# Altium PCB sensornode_v2.PcbDoc (part 1 of 2)
Units mm, origin at the board's own origin, x right, y up, seen from the top; angles counter-clockwise.
Board outline 61 x 65.5 mm, 2 copper layers (Top Layer, Bottom Layer), stack 1.6 mm thick; 116 components, 100 nets, 458 pads, 193 vias.
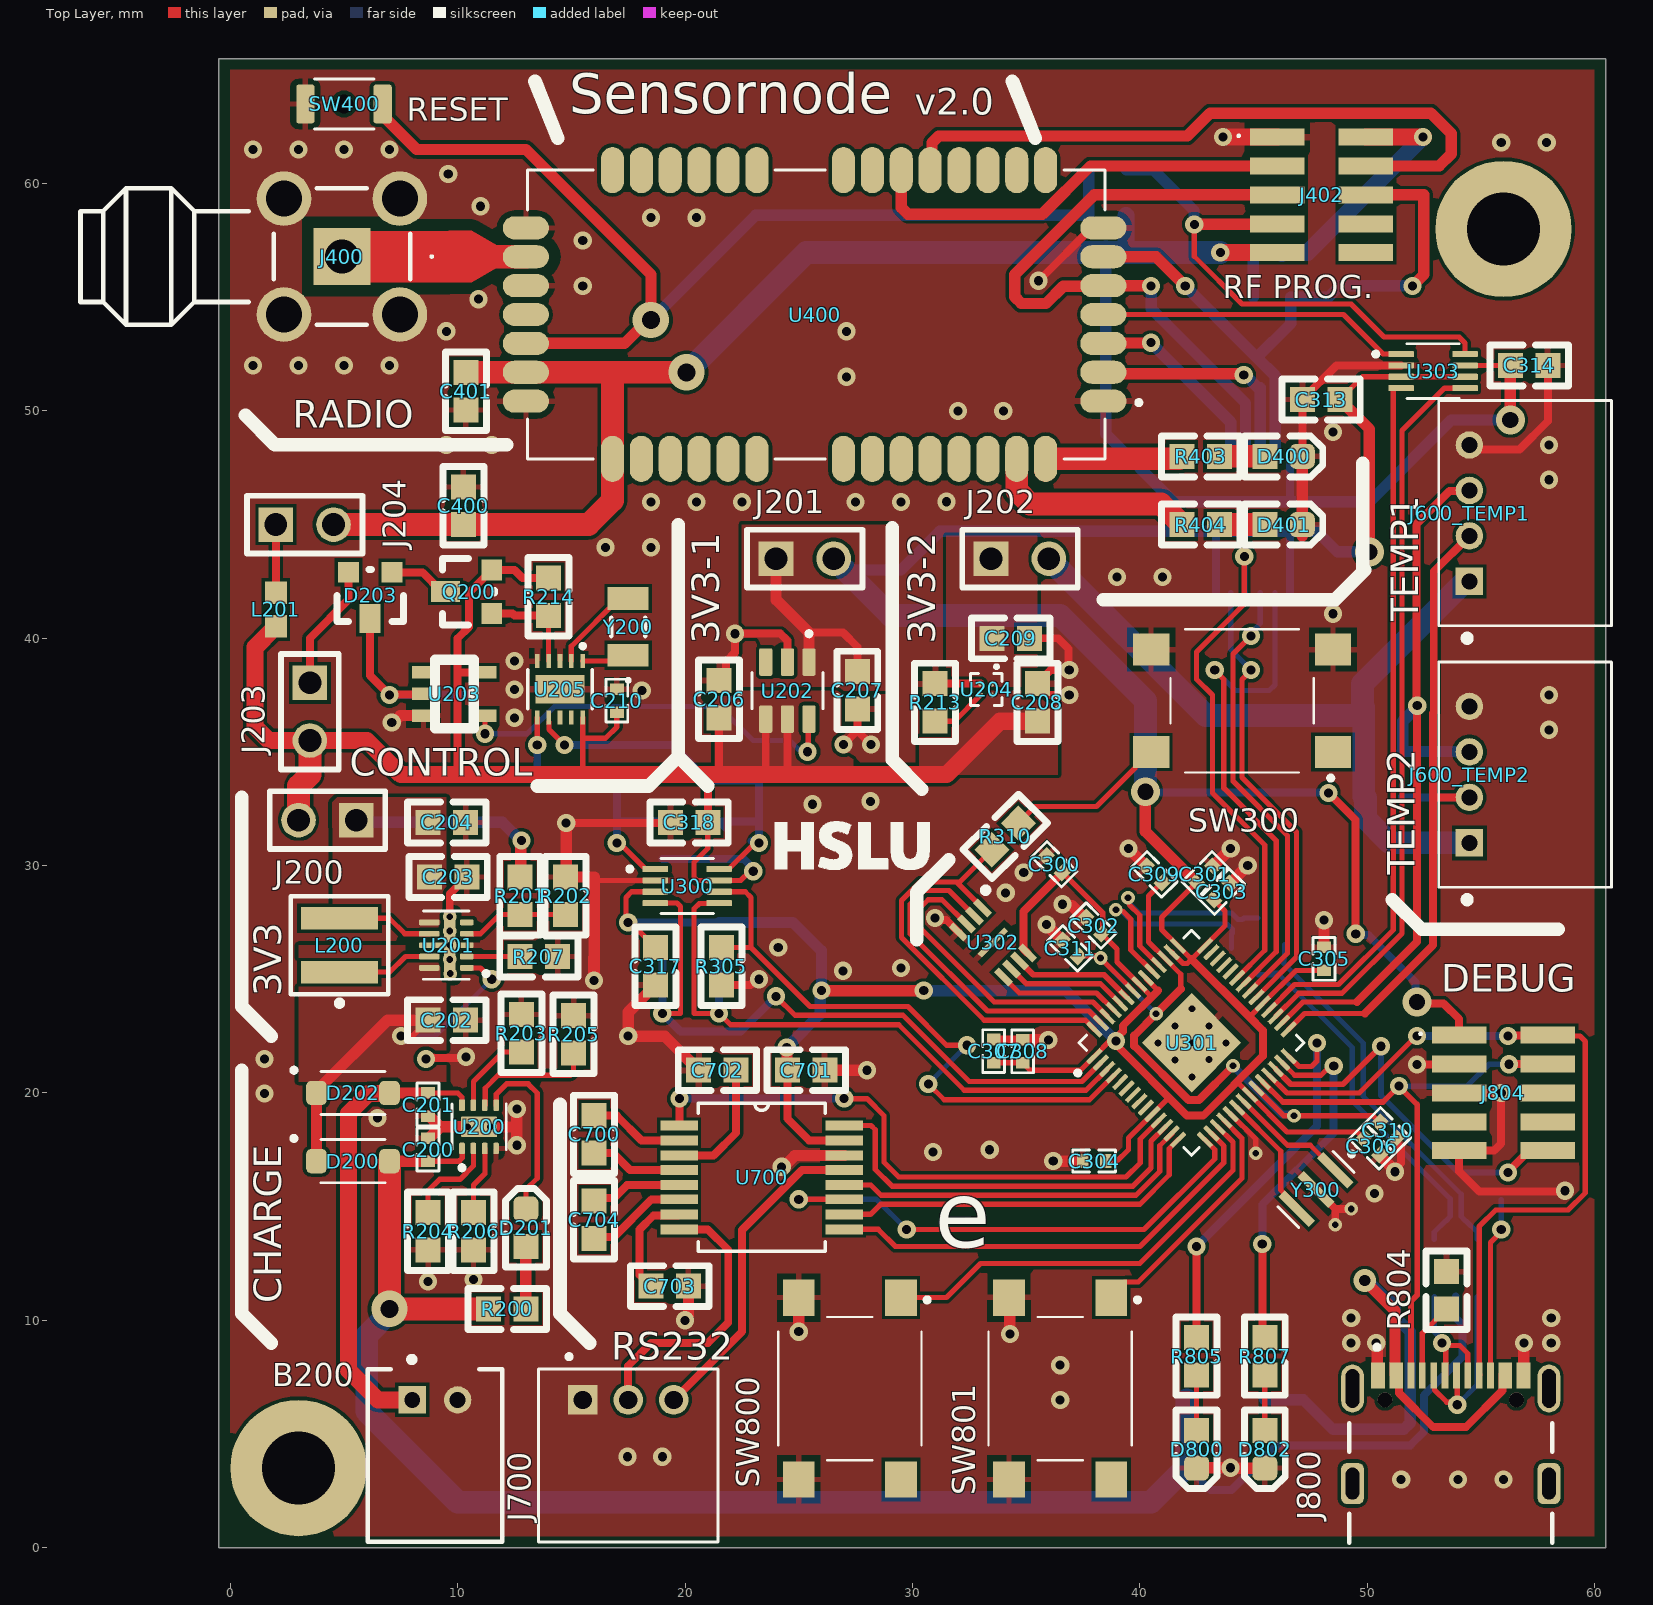
[diagram p0: Top Layer view]
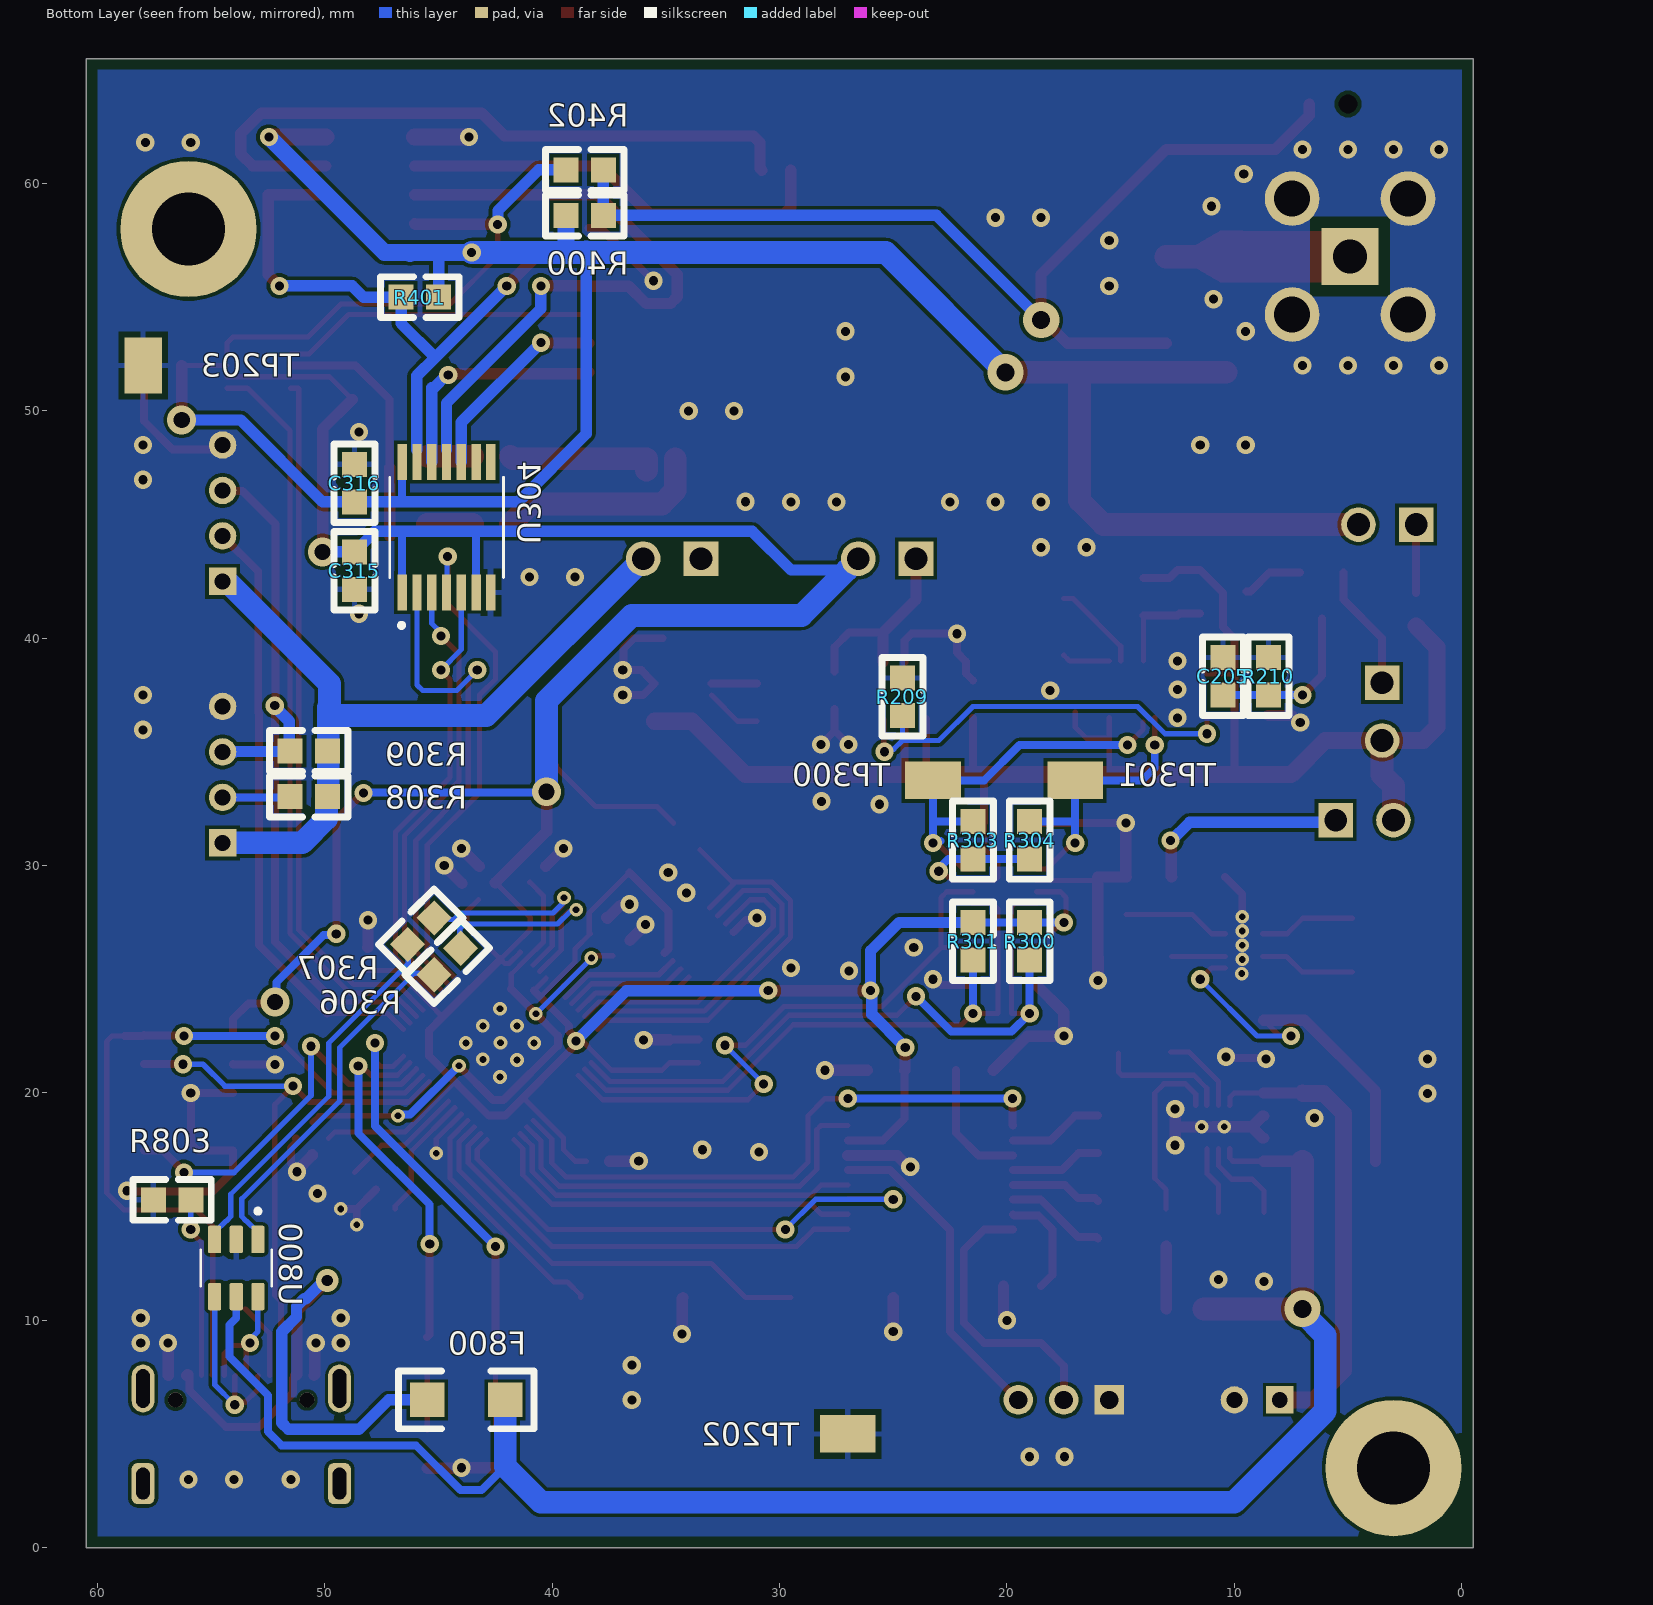
[diagram p1: Bottom Layer view, seen from below]

## Layer stack, top to bottom
Top Solder: solder mask 0.0102, Solder Resist, Dk 3.5
Top Layer: signal copper 0.035
Dielectric 1: prepreg 0.122, PP-006, Dk 4.1
Core: dielectric 1.286, FR-4, Dk 4.8
Dielectric 2: prepreg 0.122, PP-006, Dk 4.1
Bottom Layer: signal copper 0.035
Bottom Solder: solder mask 0.0102, Solder Resist, Dk 3.5

## Board outline
-0.5,0 60.5,0 60.5,65.5 -0.5,65.5

## Design rules (kind name [scope] priority, off if disabled: settings)
Clearance "Stitching GND" [IsStitchingVia and InNet('GND') vs (IsVia and (Not IsStitchingVia)) Or IsPad] p1: gap=0.127 ignorepadtopadclearanceinfootprint=FALSE
Clearance Clearance_RF_TX [InNetClass('TXM')] p2: gap=0.152 ignorepadtopadclearanceinfootprint=TRUE except(0.5: Arc-Fill Arc-Poly Arc-Region Track-Fill Track-Poly Track-Region SMDPad-Fill SMDPad-Poly SMDPad-Region THPad-Fill THPad-Poly THPad-Region Fill-Fill Fill-Poly Fill-Region Poly-Poly Poly-Region Region-Region)
Clearance Clearance_pcbway [All] p3: gap=0.152 ignorepadtopadclearanceinfootprint=FALSE
DiffPairsRouting [All] p1: maxlimit=0.254 minlimit=0.127 mostfreqgap=0.254 toplayer_minwidth=0.23 toplayer_maxwidth=0.381 toplayer_prefwidth=0.23 bottomlayer_minwidth=0.23 bottomlayer_maxwidth=0.381 bottomlayer_prefwidth=0.23 maxuncoupledlength=12.7
HoleSize HoleSize_pcbway [All] p1: absolutevalues=TRUE maxlimit=3.5 minlimit=0.3 maxpercent=80.000 minpercent=20.000
PlaneConnect PlaneConnect_1 [All] p1: planeconnectstyle=Relief reliefexpansion=0.508 reliefentries=4 reliefconductorwidth=0.254 reliefairgap=0.254
PolygonConnect PolygonConnect_RF [All vs InNetClass('3V3_RF')] p1: thpad.connectstyle=Direct thpad.reliefconductorwidth=0.5 thpad.reliefentries=4 thpad.polygonreliefangle="90 Angle" thpad.airgapwidth=0.254 smdpad.connectstyle=Relief smdpad.reliefconductorwidth=0.254 smdpad.reliefentries=4 smdpad.polygonreliefangle="90 Angle" smdpad.airgapwidth=0.254 via.connectstyle=Direct via.reliefconductorwidth=0.254 via.reliefentries=4 via.polygonreliefangle="90 Angle" via.airgapwidth=0.254
PolygonConnect PolygonConnect_VUSB [InNet('V_USB')] p2: connectstyle=Direct reliefconductorwidth=0.5 reliefentries=4 polygonreliefangle="90 Angle" airgapwidth=0.254
PolygonConnect PolygonConnect_1 [All] p3: connectstyle=Direct reliefconductorwidth=0.254 reliefentries=4 polygonreliefangle="90 Angle" airgapwidth=0.254
RoomDefinition MCU_MCU [InComponentClass('MCU_MCU')] p1: confinementstyle=ConfineIn formatcopy=TRUE lockcomponents=FALSE outline 26,12.459 52.802,12.459 52.802,41.5 26,41.5
RoomDefinition RS232 [InComponentClass('RS232')] p2: confinementstyle=ConfineIn formatcopy=TRUE lockcomponents=FALSE outline 12.5,22.5 12.5,-0.6 29.25,-0.6 29.25,22.5
RoomDefinition TEMP2 [InComponentClass('TEMP2')] p3: confinementstyle=ConfineIn formatcopy=TRUE lockcomponents=FALSE outline 52,27.2 61.75,27.2 61.75,40.6 52,40.6
RoomDefinition TEMP1 [InComponentClass('TEMP1')] p4: confinementstyle=ConfineIn formatcopy=TRUE lockcomponents=FALSE outline 52,39.2 61.75,39.2 61.75,52.127 52,52.127
RoomDefinition IO_LEDS [InComponentClass('IO_LEDS')] p5: confinementstyle=ConfineIn formatcopy=TRUE lockcomponents=FALSE outline 40.5,0.058 47.5,0.058 47.5,11.558 40.5,11.558
RoomDefinition IO_BUTTONS [InComponentClass('IO_BUTTONS')] p6: confinementstyle=ConfineIn formatcopy=TRUE lockcomponents=FALSE outline 21.5,0.5 41.5,0.5 41.5,14.5 21.5,14.5
RoomDefinition IO_USB [InComponentClass('IO_USB')] p7: confinementstyle=ConfineIn formatcopy=TRUE lockcomponents=FALSE outline 40.5,-1 63,-1 63,16.5 40.5,16.5
RoomDefinition MCU_I2C0 [InComponentClass('MCU_I2C0')] p8: confinementstyle=ConfineIn formatcopy=TRUE lockcomponents=FALSE outline 14.5,35.25 14.5,23 26.5,23 26.5,35.25
RoomDefinition MCU_RADIO [InComponentClass('MCU_RADIO')] p9: confinementstyle=ConfineIn formatcopy=TRUE lockcomponents=FALSE outline 40,40 59.5,40 59.5,54.5 40,54.5
RoomDefinition RTC [InComponentClass('RTC')] p10: confinementstyle=ConfineIn formatcopy=TRUE lockcomponents=FALSE outline 20,34.5 20,44.5 8,44.5 8,34.5
RoomDefinition POWER_3V3-RF [InComponentClass('POWER_3V3-RF')] p11: confinementstyle=ConfineIn formatcopy=TRUE lockcomponents=FALSE outline 6,47 0.5,47 0.5,39.5 6,39.5
RoomDefinition POWER_Charge [InComponentClass('POWER_Charge')] p12: confinementstyle=ConfineIn formatcopy=TRUE lockcomponents=FALSE outline 0,9 17.217,9 17.217,24.55 0,24.55
RoomDefinition POWER_3V3-2 [InComponentClass('POWER_3V3-2')] p13: confinementstyle=ConfineIn formatcopy=TRUE lockcomponents=FALSE outline 37.9,46 29,46 29,35 37.9,35
RoomDefinition POWER_CONTROL [InComponentClass('POWER_CONTROL')] p14: confinementstyle=ConfineIn formatcopy=TRUE lockcomponents=FALSE outline 14,44.5 0,44.5 0,34 14,34
RoomDefinition POWER_3V3-1 [InComponentClass('POWER_3V3-1')] p15: confinementstyle=ConfineIn formatcopy=TRUE lockcomponents=FALSE outline 29,46 19.5,46 19.5,35 29,35
RoomDefinition POWER_3V3 [InComponentClass('POWER_3V3')] p16: confinementstyle=ConfineIn formatcopy=TRUE lockcomponents=FALSE outline 0,20.4 16.8,20.4 16.8,34 0,34
RoomDefinition RADIO [InComponentClass('RADIO')] p17: confinementstyle=ConfineIn formatcopy=TRUE lockcomponents=FALSE outline 60.1,65 -9.19,65 -9.19,40.25 60.1,40.25
RoutingVias [All] p1: holewidth=0.4 width=0.8 viastyle="Through Hole" minholewidth=0.3 minwidth=0.6 maxholewidth=0.8 maxwidth=1.27
SolderMaskExpansion [All] p1: expansion=0.102 istentingtop=FALSE
Width Width_pcbway [All] p1: maxlimit=3 minlimit=0.23 preferedwidth=0.35 minimp=50.000000 maximp=50.000000 favimp=50.000000
27 further rules are at their usual default settings.

## Classes and differential pairs
net class 3V3_RF: 3V3_RF \RF_RESET CONFIG GND NetD400_A NetD401_A NetR400_1 NetR403_1 NetR404_1 NetU400_11 RF_Antenna RF_DC RF_DD RF_RXD RF_TXD UART1.CTS UART1.RTS
component class IO_LEDS: D800 D802 R805 R807
component class IO_BUTTONS: SW800 SW801
component class IO_USB: F800 J800 R803 R804 U800
component class MCU_MCU: C300 C301 C302 C303 C304 C305 C306 C307 C308 C309 C310 C311 R306 R307 R310 SW300 U301 U302 Y300
component class MCU_RADIO: C313 C314 C315 C316 U303 U304
component class MCU_I2C0: C317 C318 R300 R301 R303 R304 R305 TP300 TP301 U300
component class POWER_CONTROL: C205 D203 J203 R210 U203
component class POWER_3V3-RF: J204 L201
component class POWER_Charge: C200 C201 D201 R200 R203 R204 R205 R206 U200
component class POWER_3V3-1: C206 C207 J201 R209 U202
component class RTC: C210 Q200 R214 U205 Y200
component class POWER_3V3: C202 C203 C204 J200 L200 R201 R202 R207 U201
component class POWER_3V3-2: C208 C209 J202 R213 U204
net class TXM: RF_Antenna
net class 3V3: 3V3 3V3-1 3V3-1_ON 3V3-1_OUT 3V3-2 3V3-2_OUT 3V3_RF 3V3_VOUT \RF_RESET CONFIG GND HEADER_WAKEUP I2C0.SCL I2C0.SDA NetC205_2 NetD201_A NetD201_K NetD400_A NetD401_A NetJ204_1 NetJ402_8 NetJ402_10 NetL200_1 NetL200_2 NetQ200_G NetR201_2 NetR203_1 NetR204_1 NetR205_1 NetR206_1 NetR400_1 NetR403_1 NetR404_1 NetU201_5 NetU205_1 NetU205_2 NetU205_9 NetU400_11 POWER_3V3-1_EN POWER_3V3-2_EN POWER_3V3_PS RF_Antenna RF_DC RF_DD RF_RXD RF_TXD RTC_WakeUp UART1.CTS UART1.RTS V_BAT V_SUPPLY V_USB
net class 3V3-2: 3V3-2 GND I2C1_SCL I2C1_SDA
net class 3V3-1: 1V1 3V3 3V3-1 3V3-2 3V3_RF \ENABLE \FORCEOFF \INVALID \RF_RESET BUTTON_1 BUTTON_2 CONFIG FORCEON GND I2C0.SCL I2C0.SDA I2C0_ENABLE I2C0_SCL I2C0_SDA I2C1_SCL I2C1_SDA LED_1 LED_2 NetC700_1 NetC700_2 NetC702_2 NetC703_2 NetC704_1 NetC704_2 NetD800_A NetD802_A NetJ700_2 NetJ700_3 NetJ804_6 NetJ804_7 NetJ804_8 NetR310_1 NetU301_4 NetU301_5 NetU301_15 NetU301_20 NetU301_21 NetU301_34 NetU301_41 NetU304_3 POWER_3V3-1_EN POWER_3V3-2_EN POWER_3V3_PS QSPI_CS_N QSPI_SCLK QSPI_SD0 QSPI_SD1 QSPI_SD2 QSPI_SD3 RESET RF_CONFIG RF_R\E\S\E\T\ RF_RXD RF_TXD SWD_CLK SWDIO UART0_RXD UART0_TXD UART1.CTS UART1.RTS UART1_CTS UART1_RTS UART1_RXD UART1_TXD USB_D_N USB_D_P USB_N USB_P
component class TEMP2: J600_TEMP2
component class TEMP1: J600_TEMP1
component class sensornode_v2: MTH100 MTH101 MTH102 MTH103
component class RS232: C700 C701 C702 C703 C704 J700 U700
component class MCU: C300 C301 C302 C303 C304 C305 C306 C307 C308 C309 C310 C311 C313 C314 C315 C316 C317 C318 R300 R301 R303 R304 R305 R306 R307 R308 R309 R310 SW300 TP300 TP301 U300 U301 U302 U303 U304 Y300
component class IOs: D800 D802 F800 J800 J804 R803 R804 R805 R807 SW800 SW801 U800
component class RADIO: C400 C401 D400 D401 J400 J402 R400 R401 R402 R403 R404 SW400 U400
component class POWER: B200 C200 C201 C202 C203 C204 C205 C206 C207 C208 C209 C210 D200 D201 D202 D203 J200 J201 J202 J203 J204 L200 L201 Q200 R200 R201 R202 R203 R204 R205 R206 R207 R209 R210 R213 R214 TP202 TP203 U200 U201 U202 U203 U204 U205 Y200
channel class temperature: TEMP1 TEMP2 TEMP3 TEMP4
differential pair USB: +USB_P -USB_N
differential pair USB_D: +USB_D_P -USB_D_N

## Components (designator, comment, footprint, x,y, rotation, side; value= is the part's Value field where it differs from the comment)
B200 "Battery" "JST-S2B-PH-K-S_V - CLONED" 9,4.05 r0 top
C200 "1µF" 0402 8.7,18.016 r270 top
C201 "1µF" 0402 8.7,18.984 r90 top
C202 "Capacitor 0402" 0603 10.35,23.2 r180 top value=10uF
C203 "Capacitor 0603" 0603 10.4,29.5 r180 top value=22uF
C204 "Capacitor 0603" 0603 10.35,31.9 r180 top value=22uF
C205 "100n" 0603 10.5,39.15 r270 bottom
C206 "1µF" 0603 21.5,38.15 r270 top
C207 "100nF" 0603 27.576,36.879 r90 top
C208 "1µF" 0603 35.5,38 r270 top
C209 "100nF" 0603 35.15,40 r180 top
C210 "Capacitor 0402" 0402 17,37.766 r270 top value=100nF
C300 "Capacitor 0402" 0402 36.6,29.7 r135 top value=100nF
C301 "1µF" 0402 42.5,29.25 r45 top
C302 "Capacitor 0402" 0402 38.333,27 r135 top value=100nF
C303 "Capacitor 0402" 0402 43.25,28.5 r45 top value=100nF
C304 "Capacitor 0402" 0402 38.5,17 r180 top value=100nF
C305 "Capacitor 0402" 0402 48.111,25.389 r90 top value=100nF
C306 "Capacitor 0402" 0402 49.845,18.008 r315 top value=100nF
C307 "Capacitor 0402" 0402 33.576,21.334 r90 top value=100nF
C308 "Capacitor 0402" 0402 34.853,21.32 r90 top value=100nF
C309 "1µF" 0402 41,29.257 r135 top
C310 "Capacitor 0402" 0402 50.552,18.715 r315 top value=100nF
C311 "Capacitor 0402" 0402 37.3,26 r135 top value=100nF
C313 "" 0603 47.15,50.5 r0 top value=100nF
C314 "" 0603 56.3,52 r0 top value=100nF
C315 "" 0603 48.7,42.15 r90 bottom value=100nF
C316 "" 0603 48.7,46 r90 bottom value=100nF
C317 "" 0603 18.7,26.4 r270 top value=100nF
C318 "" 0603 19.35,31.9 r0 top value=100nF
C400 "" 0603 10.25,46.65 r270 top value=100nF
C401 "" 0603 10.36,50.04 r90 top value=100nF
C700 "Capacitor 0603" 0603 16,17.35 r90 top value=100nF
C701 "Capacitor 0603" 0603 26.15,21 r180 top value=100nF
C702 "Capacitor 0603" 0603 20.6,21 r0 top value=100nF
C703 "Capacitor 0603" 0603 20.15,11.5 r180 top value=100nF
C704 "Capacitor 0603" 0603 16,13.6 r90 top value=100nF
D200 "PMEG2010ER" SODFL3517X110N 5.395,17 r0 top
D201 "Orange" 0603-DIODE 13,13.25 r90 top
D202 "PMEG2010ER" SODFL3517X110N 5.395,20 r0 top
D203 "BAS40-05" SOT-23 7.105,42.9 r180 top
D400 "Red" 0603-DIODE 45.5,48 r0 top
D401 "Orange" 0603-DIODE 45.5,45 r0 top
D800 "Green" 0603-DIODE 42.5,5.15 r270 top
D802 "Red" 0603-DIODE 45.5,5.15 r270 top
F800 "500mA" 1206 45.5,6.5 r180 bottom
J200 "HEADER_2x1_TD" HEADER_2_RM_2.54 5.54,32 r270 top
J201 "HEADER_2x1_TD" HEADER_2_RM_2.54 24,43.5 r90 top
J202 "HEADER_2x1_TD" HEADER_2_RM_2.54 33.46,43.5 r90 top
J203 "HEADER_2x1_TD" HEADER_2_RM_2.54 3.5,38.04 r0 top
J204 "HEADER_2x1_TD" HEADER_2_RM_2.54 2,45 r90 top
J400 "HEADER_2x1_TD" SMARACONNECTOR 4.91,56.79 r0 top
J402 "HEADER_5x2_LR" HEADER_SMD_1.27 48,59.5 r270 top (schematic designator J401)
J600_TEMP1 "I2C - TMP117" JST_S4B-PH-K-S(LF)(SN) 54.5,45.5 r90 top (schematic designator J600)
J600_TEMP2 "I2C - TMP117" JST_S4B-PH-K-S(LF)(SN) 54.5,34 r90 top (schematic designator J600)
J700 "CON3" JST_S3B-PH-K-S(LF)(SN) 15.5,6.5 r0 top
J800 "USB-C" USB_GCT_4105-GF-A 53.68,2.82 r0 top value=USB4105-GF-A
J804 "HEADER_5x2_LR" HEADER_SMD_1.27 56,20 r270 top
L200 "0.47uH" FP-XFL4015-MFG 4.8,26.5 r90 top
L201 "BLM18SG331TN1" 1608X65N_BEADC 2,41.265 r90 top
Q200 "DMP3099LQ" "SOT-23 - FET" 11.5,41.095 r90 top
R200 "270" 0603 13,10.5 r180 top
R201 "511k" 0603 12.75,29.5 r270 top
R202 "91k" 0603 14.75,27.85 r90 top
R203 "24k" 0603 12.8,21.8 r90 top
R204 "1k5" 0603 8.7,14.75 r270 top
R205 "8.2k" 0603 15.1,21.75 r90 top
R206 "10k" 0603 10.7,14.75 r270 top
R207 "100k" 0603 14.4,26 r180 top
R209 "100k" 0603 24.6,36.6 r90 bottom
R210 "10k" 0603 8.5,39.15 r270 bottom
R213 "100k" 0603 31,36.35 r90 top
R214 "330k" 0603 14,41 r90 top
R300 "DNP" 0603 19,27.5 r270 bottom
R301 "DNP" 0603 21.5,27.5 r270 bottom
R303 "DNP" 0603 21.5,30.3 r90 bottom
R304 "DNP" 0603 19,30.3 r90 bottom
R305 "100k" 0603 21.6,26.4 r270 top
R306 "27" 0603 44.033,26.367 r315 bottom
R307 "27" 0603 45.2,27.7 r315 bottom
R308 "4k7" 0603 49.884,33.034 r0 bottom
R309 "4k7" 0603 49.884,35.034 r0 bottom
R310 "1k" 0603 34.667,31.867 r225 top
R400 "5k6" 0603 37.75,58.6 r0 bottom
R401 "8k2 (DNP)" 0603 46.65,55 r180 bottom
R402 "0" 0603 39.4,60.6 r180 bottom
R403 "150 DNP" 0603 41.85,48 r0 top
R404 "150 DNP" 0603 41.85,45 r0 top
R803 "5k1" 0603 57.55,15.3 r180 bottom
R804 "5k1" 0603 53.5,12.15 r270 top
R805 "120" 0603 42.5,7.604 r90 top
R807 "120" 0603 45.5,7.604 r90 top
SW300 "BOOTSEL" SWITCH_B3FS1010P 44.5,37.25 r0 top
SW400 "B3U-1000P-B" OMRON-B3U-1000P-2-B_V 5,63.5 r0 top
SW800 "SW_TACTILE_1" SWITCH_B3FS1010P 27.25,7 r90 top
SW801 "SW_TACTILE_1" SWITCH_B3FS1010P 36.5,7 r90 top
TP202 "TP_SMD" TP+245X165 27,5 r180 bottom
TP203 "TP_SMD" TP+245X165 58,52 r90 bottom
TP300 "TP_SMD" TP+245X165 23.25,33.75 r180 bottom
TP301 "TP_SMD" TP+245X165 17,33.75 r180 bottom
U200 "IC_BQ25172DSGR" IC_BQ25172DSGR 10.94,18.51 r90 top
U201 "TPS63802DLAR" VREG_TPS63802DLAR 9.5,26.5 r180 top
U202 "TPS22860DBVR" SOT95P280X145-6N 24.5,37.7 r270 top
U203 "SN74AUP1G32" SOT23-5 8.5,38.5 r270 top
U204 "TPS22908" BGA4C50P2X2_88X88X62N 33.25,37.75 r270 top
U205 "PCF85063ATL/1,118" 10-DFN(2.6X2.6) 14.5,37.755 r270 top
U300 "TCA9406" VSSOP_SOP50P310X90-8N 20.095,29.1 r0 top
U301 "RP2040_2" QFN40P700X700X90-57N 42.277,22.207 r45 top
U302 "W25Q16JVUXIQ" SON50P300X200X60-9N 33.54,26.62 r315 top
U303 "TXU0102PWR" VFSOP-8 52.905,51.75 r0 top
U304 "TXU0104PWR" TSSOP-14 44.65,44.88 r90 bottom
U400 "RC1701HP-RC232" RF_RC1701HP 25.065,54.24 r180 top
U700 "MAX3221 SSOP" SSOP_SOP65P780X200-16N 23.368,16.286 r0 top
U800 "ESD_USBLC6-2SC6_1" SOT95P280X145-6N 53.9,12.3 r270 bottom
Y200 "SC32S-7PF20PPM" SC32S7PF20PPM 17.5,40.5 r90 top
Y300 "CSTNE12M0GH5L000R0" OSC_CSTNE12M0GH5L000R0 47.751,15.753 r225 top

## Footprints (in the part's own frame and the unit in brackets; to place one, negate y for a bottom-side part, rotate by r counter-clockwise, add the part's x,y. Pads: shape width x height; smd on the part's side, far side on the other; paste and mask are expansions set on the pad)
10-DFN(2.6X2.6) [mil]
  rect 24x8 smd: 1(-49,39.37) 2(-49,19.68) 3(-49,0) 4(-49,-19.68) 5(-49,-39.37) 6(49,-39.37) 7(49,-19.68) 8(49,0) 9(49,19.68) 10(49,39.37)
  rect 49x85 smd paste-78.74: 11(0,0)
  silkscreen extent -77,-56 34,56, body extent -51,-51 51,51, height 20
0402 [mil]
  rect 20x24 smd: 1(0,0) 2(40,0)
  silkscreen extent -17,-19 57,19, body extent -8,-10 48,10, height 18
0603 [mm]
  rect 1.1x1.1 smd: 1(0,0) 2(1.65,0)
  silkscreen extent -0.9,-0.9 2.55,0.9, body extent -0.45,-0.43 2.1,0.43, height 0.45
0603-DIODE [mm]
  rect 1.1x1.1 smd: A(0,0)
  rrect50% 1.1x1.1 smd: K(1.65,0)
  silkscreen extent -0.9,-0.9 2.55,0.9, body extent -0.45,-0.43 2.1,0.43, height 0.45
1206 [mil]
  rect 60x60 smd: 1(0,0) 2(135,0)
  silkscreen extent -50,-50 185,50, body extent 4,-31 130,31, height 51
1608X65N_BEADC [mm]
  rect 1x0.97 smd: 1(-0.735,0) 2(0.735,0)
BGA4C50P2X2_88X88X62N [mm]
  round 0.23 smd: A1(-0.25,0.25) A2(0.25,0.25) B1(-0.25,-0.25) B2(0.25,-0.25)
  silkscreen extent -1.07,-0.7 0.7,0.7, body extent -0.44,-0.44 0.44,0.44, height 0.63
FP-XFL4015-MFG [mm]
  rect 0.98x3.4 smd paste+0 mask+0: 1(-1.185,0) 2(1.185,0)
  silkscreen extent -2.67,-2.15 2.15,2.15, body extent -2.25,-2.25 2.25,2.25, height 0.25
HEADER_2_RM_2.54 [mil] "Header 2 Pin 2.54mm"
  rect 60x60 hole 39.37: 1(0,0)
  round 60 hole 39.37: 2(0,-100)
  silkscreen extent -50,-150 50,50, body extent -50,-150 50,50, height 394
HEADER_SMD_1.27 [mm]
  rect 0.75x2.4 smd: 1(-2.54,-1.95) 2(-2.54,1.95) 3(-1.27,-1.95) 4(-1.27,1.95) 5(0,-1.95) 6(0,1.95) 7(1.27,-1.95) 8(1.27,1.95) 9(2.54,-1.95) 10(2.54,1.95)
  silkscreen extent -2.65,-3.7 -2.55,-3.6, body extent -3.08,-2.4 3.27,2.6, height 4.55
IC_BQ25172DSGR [mm]
  rrect40% 0.5x0.25 smd mask+0.05: 1(-0.95,0.75) 2(-0.95,0.25) 3(-0.95,-0.25) 4(-0.95,-0.75) 5(0.95,-0.75) 6(0.95,-0.25) 7(0.95,0.25) 8(0.95,0.75)
  rrect12% 0.9x1.6 smd paste-2 mask+0.05: 9(0,0)
  silkscreen extent -1.9,-1.19 1,1.19, body extent -1,-1 1,1, height 0.8
"JST-S2B-PH-K-S_V - CLONED" [mm] "THD, 2-Leads, Body 7.6x5.9mm, Pitch 2mm"
  rect 1.2x1.2 hole 0.7: 1(-1,2.45)
  round 1.2 hole 0.7: 2(1,2.45)
  silkscreen extent -2.95,-3.8 2.95,4.35, body extent -2.95,-3.8 2.95,3.8, height 4.8
JST_S3B-PH-K-S(LF)(SN) [mm]
  rect 1.308x1.308 hole 0.8: 1(0,0)
  round 1.308 hole 0.8: 2(2,0) 3(4,0)
  silkscreen extent -1.95,-6.25 5.95,2, body extent -2,-6.3 5.9,1.3, height 4.8
JST_S4B-PH-K-S(LF)(SN) [mm]
  rect 1.208x1.208 hole 0.7: 1(-3,0)
  round 1.208 hole 0.7: 2(-1,0) 3(1,0) 4(3,0)
  silkscreen extent -5.64,-6.25 4.95,1.35, body extent -5,-6.2 4.9,1.4, height 4.8
OMRON-B3U-1000P-2-B_V [mm] "SMT, 2-Leads, Body 3x2.5mm"
  rrect25% 0.8x1.7 smd: 1(-1.7,0) 2(1.7,0)
  round 0 hole 0.85 unplated: H1(0,0)
  silkscreen extent -1.3,-1.1 1.3,1.1, body extent -2,-1.25 2,1.25, height 1.6
OSC_CSTNE12M0GH5L000R0 [mm]
  rect 0.4x1.9 smd: 1(-1.2,0) 2(0,0) 3(1.2,0)
  silkscreen extent -2.32,-0.65 1.72,0.65, body extent -1.6,-0.65 1.6,0.65, height 0.8
QFN40P700X700X90-57N [mm]
  rrect25% 0.84x0.2 smd: 1(-3.435,2.6) 2(-3.435,2.2) 3(-3.435,1.8) 4(-3.435,1.4) 5(-3.435,1) 6(-3.435,0.6) 7(-3.435,0.2) 8(-3.435,-0.2) 9(-3.435,-0.6) 10(-3.435,-1) 11(-3.435,-1.4) 12(-3.435,-1.8) 13(-3.435,-2.2) 14(-3.435,-2.6) 29(3.435,-2.6) 30(3.435,-2.2) 31(3.435,-1.8) 32(3.435,-1.4) 33(3.435,-1) 34(3.435,-0.6) 35(3.435,-0.2) 36(3.435,0.2) 37(3.435,0.6) 38(3.435,1) 39(3.435,1.4) 40(3.435,1.8) 41(3.435,2.2) 42(3.435,2.6)
  rrect25% 0.2x0.84 smd: 15(-2.6,-3.435) 16(-2.2,-3.435) 17(-1.8,-3.435) 18(-1.4,-3.435) 19(-1,-3.435) 20(-0.6,-3.435) 21(-0.2,-3.435) 22(0.2,-3.435) 23(0.6,-3.435) 24(1,-3.435) 25(1.4,-3.435) 26(1.8,-3.435) 27(2.2,-3.435) 28(2.6,-3.435) 43(2.6,3.435) 44(2.2,3.435) 45(1.8,3.435) 46(1.4,3.435) 47(1,3.435) 48(0.6,3.435) 49(0.2,3.435) 50(-0.2,3.435) 51(-0.6,3.435) 52(-1,3.435) 53(-1.4,3.435) 54(-1.8,3.435) 55(-2.2,3.435) 56(-2.6,3.435)
  rect 3.1x3.1 smd paste-0.57: 57(0,0)
  silkscreen extent -4.57,-3.5 3.5,3.5, body extent -3.5,-3.5 3.5,3.5, height 0.9
RF_RC1701HP [mil]
  oval 80x40 smd: 1(-525,150) 2(-525,100) 3(-525,50) 4(-525,0) 5(-525,-50) 6(-525,-100) 7(-525,-150) 8(475,-150) 9(475,-100) 10(475,-50) 11(475,0) 12(475,50) 13(475,100) 14(475,150)
  oval 40x80 smd: 15(-425,-250) 16(-375,-250) 17(-325,-250) 18(-275,-250) 19(-225,-250) 20(-175,-250) 21(-125,-250) 22(-75,-250) 23(-75,250) 24(-125,250) 25(-175,250) 26(-225,250) 27(-275,250) 28(-325,250) 29(-375,250) 30(-425,250) 31(75,250) 32(75,-250) 33(125,250) 34(125,-250) 35(175,250) 36(175,-250) 37(225,250) 38(225,-250) 39(275,250) 40(275,-250) 41(325,250) 42(325,-250)
  silkscreen extent -590,-250 472,250, body extent -528,-252 472,254, height 154
SC32S7PF20PPM [mm]
  rect 1x1.8 smd: 1(-1.25,0) 2(1.25,0)
  silkscreen extent -2.4,-0.75 0.4,0.75, body extent -1.65,-0.8 1.65,0.8, height 0.84
SMARACONNECTOR [mm]
  rect 2.5x2.5 hole 1.5: 1(0,0)
  round 2.4 hole 1.6: 2(-2.55,-2.55) 2(-2.55,2.55) 2(2.55,-2.55) 2(2.55,2.55)
  silkscreen extent -11.5,-3 4,3, body extent -11.4,-3.17 2.9,3.17, height 7.78
SODFL3517X110N [mm]
  rrect50% 0.91x1.07 smd: A(1.605,0) K(-1.605,0)
  silkscreen extent -2.7,-0.95 1.4,1.1
SON50P300X200X60-9N [mm]
  rect 0.9x0.3 smd: 1(-1.4,0.75) 2(-1.4,0.25) 3(-1.4,-0.25) 4(-1.4,-0.75) 5(1.4,-0.75) 6(1.4,-0.25) 7(1.4,0.25) 8(1.4,0.75)
  rect 0.25x1.65 smd: 9(0,0)
  silkscreen extent -1.97,1.28 -1.73,1.52, body extent -1.55,-1 1.55,1, height 0.6
SOT23-5 [mm]
  rect 0.55x1 smd: 1(0,0) 2(0.95,0) 3(1.9,0) 4(1.9,2.7) 5(0,2.7)
  silkscreen extent -0.55,0.5 2.45,2.2, body extent -0.55,0.5 2.45,2.2, height 1.45
SOT95P280X145-6N [mm]
  rrect25% 1.21x0.58 smd: 1(-1.255,0.95) 2(-1.255,0) 3(-1.255,-0.95) 4(1.255,-0.95) 5(1.255,0) 6(1.255,0.95)
  silkscreen extent -2.6,-1.56 0.8,1.56, body extent -1.35,-1.45 1.35,1.45, height 1.45
SOT-23 [mil]
  rect 36x36 smd: 1(0,0) 2(75,0)
  rect 36x50 smd: 3(38,80)
  silkscreen extent -20,-5 95,85, body extent -20,-5 95,85, height 69
"SOT-23 - FET" [mil]
  rect 36x50 smd: D(38,80)
  rect 36x36 smd: G(0,0) S(75,0)
  silkscreen extent -20,-5 95,85, body extent -20,-5 95,85, height 69
SSOP_SOP65P780X200-16N [mil]
  rect 65x17 smd: 1(-143,90) 2(-143,64) 3(-143,38) 4(-143,13) 5(-143,-13) 6(-143,-38) 7(-143,-64) 8(-143,-90) 9(143,-90) 10(143,-64) 11(143,-38) 12(143,-13) 13(143,13) 14(143,38) 15(143,64) 16(143,90)
  silkscreen extent -110,-128 110,128, body extent -154,-128 154,128, height 79
SWITCH_B3FS1010P [mm]
  rect 1.6x1.4 smd: 1(-4,-2.25) 1(4,-2.25) 2(-4,2.25) 2(4,2.25)
  silkscreen extent -3.15,-3.5 4,3.15, body extent -4,-3.2 4,3.1, height 4.3
TP+245X165 [mm]
  rect 2.45x1.65 smd: 1(0,0)
  body extent -1,-0.63 1,0.63, height 1.44
TSSOP-14 [mm] "TSSOP-14 / SOP65P640X120-14N"
  rect 1.57x0.41 smd: 1(-2.87,1.95) 2(-2.87,1.3) 3(-2.87,0.65) 4(-2.87,0) 5(-2.87,-0.65) 6(-2.87,-1.3) 7(-2.87,-1.95) 8(2.87,-1.95) 9(2.87,-1.3) 10(2.87,-0.65) 11(2.87,0) 12(2.87,0.65) 13(2.87,1.3) 14(2.87,1.95)
  silkscreen extent -4.41,-2.5 2.2,2.5, body extent -3.2,-2.5 3.2,2.5, height 1.2
USB_GCT_4105-GF-A [mm]
  rect 0.6x1.15 smd: A1_B12(-3.2,4.755) A4_B9(-2.4,4.755) B1_A12(3.2,4.755) B4_A9(2.4,4.755)
  rect 0.3x1.15 smd: A5(-1.25,4.755) A6(-0.25,4.755) A7(0.25,4.755) A8(1.25,4.755) B5(1.75,4.755) B6(0.75,4.755) B7(-0.75,4.755) B8(-1.75,4.755)
  oval 1x2.1 hole 0.6 slot 1.7 at 90 deg: SH1(-4.32,4.18) SH2(4.32,4.18)
  rrect50% 1x1.8 hole 0.6 slot 1.4 at 90 deg: SH3(-4.32,0) SH4(4.32,0)
  round 0.65 hole 0.65 unplated: ""(-2.89,3.68) ""(2.89,3.68)
  silkscreen extent -4.47,-2.6 4.47,6.1, body extent -4.47,-2.6 4.47,5.11, height 3.31
VFSOP-8 [mm] "SOP50P310X90-8N"
  rrect25% 1.12x0.27 smd: 1(-1.405,0.75) 2(-1.405,0.25) 3(-1.405,-0.25) 4(-1.405,-0.75) 5(1.405,-0.75) 6(1.405,-0.25) 7(1.405,0.25) 8(1.405,0.75)
  silkscreen extent -2.62,-1.2 1.15,1.2, body extent -1.5,-1 1.6,1, height 0.9
VREG_TPS63802DLAR [mm]
  rrect40% 0.6x0.25 smd mask+0: 1(-0.9,1) 2(-0.9,0.5) 3(-0.9,0) 4(-0.9,-0.5) 5(-0.9,-1)
  rrect40% 0.9x0.25 smd mask+0: 6(0.75,-1) 7(0.75,-0.5) 9(0.75,0.5) 10(0.75,1)
  rrect12% 0.5x3 smd paste-2 mask+0.05: 8(-0.15,0)
  rrect40% 1.3x0.25 smd paste-2 mask+0: 8(0.55,0)
  silkscreen extent -1.85,-1.5 1,1.5, body extent -1,-1.5 1,1.5, height 1
VSSOP_SOP50P310X90-8N [mm]
  rrect25% 1.12x0.27 smd: 1(-1.405,0.75) 2(-1.405,0.25) 3(-1.405,-0.25) 4(-1.405,-0.75) 5(1.405,-0.75) 6(1.405,-0.25) 7(1.405,0.25) 8(1.405,0.75)
  silkscreen extent -2.62,-1.2 1.15,1.2, body extent -1.55,-1 1.55,1, height 0.9

## Part data
C200 C201 C203 C204 C205 C206 C207 C208 C209 C210 C400 C401 C700 C701 C702 C703 C704: library part C, Case/Package=0402, Manufacturer=TDK, Manufacturer Part Number=C1005X6S0J105K050BC, Max Operating Temperature=85°C, Tolerance=10%, Voltage Rating=6.3V, Component Type=Capacitors, Mounting Technology=SM, Pins=2, RoHS Compliant=True
C202: library part C, Case/Package=0402, Manufacturer=TDK, Manufacturer Part Number=C1005X6S0J105K050BC, Max Operating Temperature=85°C, Tolerance=10%, Voltage=25, Voltage Rating=6.3V, Component Type=Capacitors, Mounting Technology=SM, Pins=2, RoHS Compliant=True
C300 C301 C302 C303 C304 C305 C306 C307 C308 C309 C310 C311 C313 C314 C315 C316 C317 C318: library part C, Case/Package=0402, Manufacturer="Kyocera AVX", Manufacturer Part Number=04026D105KAT2A, Max Operating Temperature=85°C, Tolerance=10%, Voltage Rating=6.3V, Component Type=Capacitors, Mounting Technology=SM, Pins=2, RoHS Compliant=True
D200 D202: library part Schotky_1, Supplier Part Number 1=7040635, Supplier 1="Future Electronics"
D201 D400 D401 D800 D802: library part LED_1
D203: library part Schotky_BAS40-5, Supplier Part Number 1=726-BAS4005E6327HTSA, Supplier 1=Mouser
F800: library part FUSE_1, "Resettable Fuse"
J400: Supplier Part Number 1=471-SMARACONNECTORWP, Supplier 1=Mouser
J402: Supplier Part Number 1=2053212, Supplier 1=Rs
J600_TEMP1 J600_TEMP2: library part CON4
J800: library part USB-C_2, "Connector 24 (16+8 Dummy)"
L200: library part L?, Supplier Part Number=81-1276AS-H-R47MP2, Supplier Part Number 1=2289211, Name=XFL4015-471MEB, Supplier=Mouser, Supplier 1=Farnell
L201: library part L?, "330 Ohms @ 100 MHz 1 Power Line Ferrite Bead 0603 (1608 Metric) 1.5A 70mOhm", Supplier Part Number 1=81-BLM18SG331TN1D, Info=Ferritperle, Supplier 1=Mouser
Q200: library part "MOSFET P"
R200 R201 R203 R204 R205 R206 R207 R209 R210 R213 R214 R300 R301 R303 R304 R305 R306 R307 R308 R309 R310 R400 R401 R402 R403 R404 R803 R804 R805 R807: library part R?, "Normaler Widerstand"
R202: library part R?, "Normaler Widerstand", Supplier Part Number=595-TPS63802DLAR, Supplier=Mouser
SW300: library part SW_TACTILE_1
SW400: library part CMP-011-00011-1, "Ultra-small Surface-mounting Tactile Switches with High Contact Reliability, SPST-NO, -25 to 70 degC, 2-Pin SMD, RoHS, Tape and Reel", Voltage Rating=12V, Pins=2, RoHS Compliant=Details
TP202 TP203 TP300 TP301: library part Testpoint, "Testpoint"
  TP202 TP203: Name=GND
  TP300: Name=SDA
  TP301: Name=SCL
U200: "Charge IC. 0.8-A, one- to six-cell NiMH stand-alone linear charger in a QFN package", Package=None, Check_prices=https://www.snapeda.com/parts/BQ25172DSGR/Texas+Instruments/view-part/?ref=eda, MF="Texas Instruments", MP=BQ25172DSGR, SnapEDA_Link=https://www.snapeda.com/parts/BQ25172DSGR/Texas+Instruments/view-part/?ref=snap
U201: Package="WFDFN-10 Richtek", Check_prices=https://www.snapeda.com/parts/RT6150B-33GQW/Richtek+USA+Inc./view-part/?ref=eda, MF="Richtek USA", MP=RT6150B-33GQW, SnapEDA_Link=https://www.snapeda.com/parts/RT6150B-33GQW/Richtek+USA+Inc./view-part/?ref=snap
U202: "0.73-?, 5-V, ultra-low leakage load switch 6-SOT-23 -40 to 85", Package="SOT-23-6 Texas Instruments", Digi-Key_Part_Number=296-43982-1-ND, MF="Texas Instruments", MP=TPS22860DBVR, SnapEDA_Link=https://www.snapeda.com/parts/TPS22860DBVR/Texas%20Instruments/view-part/473340/?ref=snap, Texas_Instruments-Purchase-URL=https://snapeda.com/shop?store=Texas+Instruments&id=473340
U203: library part "Gatter OR1x2_1 SN74AUP1G32", Package=SOT-353, Supplier Part Number 1=595-SN74AUP1G32DCKR, Distributor=Farnell, Distributor Nr.=1085242, Supplier 1=Mouser
U204: "3.6-V, 1-A, 28-mΩ On-Resistance Load Switch with Controlled Rise Time", Package="SOT-23-6 Texas Instruments", Digi-Key_Part_Number=296-43982-1-ND, MF="Texas Instruments", MP=TPS22860DBVR, SnapEDA_Link=https://www.snapeda.com/parts/TPS22860DBVR/Texas%20Instruments/view-part/473340/?ref=snap, Texas_Instruments-Purchase-URL=https://snapeda.com/shop?store=Texas+Instruments&id=473340
U205: "Real Time Clock (RTC) IC Clock/Calendar - IÂ²C, 2-Wire Serial 10-XFDFN Exposed Pad", Package="DFN-10 NXP Semiconductors", Availability="In Stock", Check_prices=https://www.snapeda.com/parts/PCF85063ATL/1,118/NXP+USA+Inc./view-part/?ref=eda, MF="NXP USA", MP=PCF85063ATL/1,118, Price=None, Purchase-URL=https://pricing.snapeda.com/search/part/PCF85063ATL/1,118/?ref=eda, SnapEDA_Link=https://www.snapeda.com/parts/PCF85063ATL/1,118/NXP+USA+Inc./view-part/?ref=snap
U300: library part IC_TCA9406, "2-bit bidirectional 1MHz I2C/SMBus voltage level translator with internal pull-up resistor"
U301: "RP2040 chip for Raspberry Pi Pico - ARMÂ® CortexÂ®-M0+ MCU 32-Bit", Package=None, Availability="In Stock", Check_prices=https://www.snapeda.com/parts/RP2040/Raspberry+Pi/view-part/?ref=eda, MF="Raspberry Pi", MP=RP2040, Price=None, Purchase-URL=https://pricing.snapeda.com/search/part/RP2040/?ref=eda, SnapEDA_Link=https://www.snapeda.com/parts/RP2040/Raspberry+Pi/view-part/?ref=snap
U302: "No Description Available", Case=USON-8, Mfr_Name=Winbond, RefDes=RefDes, Type=Type
U303: library part IC_TXU0102, "Dual-channel fixed multidirectional level shifter", Supplier Part Number 1=595-TXU0102DCUR, Supplier 1=Mouser
U304: library part IC_TXU0204_TSSOP, "Four-channel fixed multidirectional level shifter"
U700: library part RS232_MAX3221E_TI_TSSOP, "Maxim integrated", Supplier Part Number 1=595-MAX3221IDBR, Hersteller="Maxim Integrated", Supplier 1=Mouser
U800: "17V Clamp 5A (8/20Âµs) Ipp Tvs Diode Surface Mount SOT-23-6", Package="SOT-23-6 STMicroelectronics", Availability="In Stock", Check_prices=https://www.snapeda.com/parts/USBLC6-2SC6/STMicroelectronics/view-part/?ref=eda, MF=STMicroelectronics, MP=USBLC6-2SC6, Price=None, Purchase-URL=https://pricing.snapeda.com/search/part/USBLC6-2SC6/?ref=eda, SnapEDA_Link=https://www.snapeda.com/parts/USBLC6-2SC6/STMicroelectronics/view-part/?ref=snap
Y200: library part Crystal_1, "Crystal"
Y300: library part Crystal_3, "SMT Crystal"
B200: battery_config=3S1P, product=HHR-210AAB

## Free pads (board coordinates)
  round 6 hole 3.2: 5(3,3.5) 5(56,58)

## Via types
v1: diameter 0.8, hole 0.4, Top Layer to Bottom Layer, tented both sides, 150 vias
v2: diameter 0.6, hole 0.3, Top Layer to Bottom Layer, tented both sides, 25 vias
v3: diameter 0.8, hole 0.4, Top Layer to Bottom Layer, tented top, 10 vias
v4: diameter 1.27, hole 0.711, Top Layer to Bottom Layer, tented both sides, 4 vias
v5: diameter 1.6, hole 0.8, Top Layer to Bottom Layer, tented both sides, 3 vias
v6: diameter 1, hole 0.5, Top Layer to Bottom Layer, tented both sides, 1 vias

## Nets (pads, with @x,y where several pads share a name; then routed paths per layer and width w, separated by ;. In a path a pad name is that pad's centre, name@x,y a point inside that pad or via, vN(x,y) a via of type N, cw(c..) or ccw(c..) an arc to the next point about the centre after c; other vN are vias at no path point)
1V1: C309.1 C310.1 C311.1 U301.23 U301.45 U301.50 | length 31.1
  Top Layer w0.23: C311.1@37.336,26.036 38.075,26.036 38.178,25.933 v2(38.278,25.933) 38.278,25.928 39.493,24.713 39.493,24.708 U301.50@39.707,24.495 ; C309.1@40.986,29.271 40.382,28.668 40.382,26.647 U301.45@41.121,25.909 41.807,25.222 41.807,24.569 ; v2(44.101,21.199) v2@44.117,21.199 ; U301.23@45.114,20.202 U301.23@45.13,20.202 46.339,18.994 50.274,18.994 C310.1@50.552,18.715
  Top Layer w0.35: v2@40.8,23.4 v2@40.8,23.494 ; 41.807,24.569 v2(40.72,23.482) 39.757,22.519 39.757,22.071 42.141,19.688 42.606,19.688 v2@44.117,21.199
  Bottom Layer w0.23: v2(38.278,25.933) 38.278,25.928 40.72,23.487 v2(40.72,23.482)
  Bottom Layer w0.35: v2(44.101,21.199) 46.253,19.047 46.739,19.047 v2(46.787,18.999)
3V3: C206.2 C208.2 C210.2 C318.2 J200.2 J203.2 L201.1 Q200.S R214.2 R303.1 R304.1 U202.4 U202.5 U203.5 U204.A2 U205.10 U300.7 | length 82.4
  Top Layer w0.23: 15.5,34 15.5,35.6 ; U205.10@15.5,36.511 15.5,35.6 ; C210.2@17,36.75 17,36.1 16.5,35.6 15.5,35.6 ; C318.2@21,31.9 21,30.75 20.4,30.15 20.4,29.485 20.535,29.35 U300.7@21.5,29.35 22.446,29.35 22.846,29.75 v1(23,29.75)
  Top Layer w0.35: 10,34 10,38.5 ; U203.5@11.2,38.5 10,38.5 ; R214.2@14,42.65 12.85,42.65 12.5,43 Q200.S@11.5,43 10.5,42 10.5,40.5 10,40 10,38.5 ; C318.2@21,31.9 21,34 ; 21.5,34 C206.2@21.5,36.5 ; 23.5,34 23.55,34.05 U202.4@23.55,36.445 ; U202.5@24.5,36.445 24.5,34.1 24.6,34
  Top Layer w0.75: L201.1@2,40.53 1.89,40.42 1.89,40.405 1.092,39.607 1.092,36.093 1.686,35.5 J203.2@3.5,35.5 6,35.5 7.5,34 10,34 15.5,34 21,34 21.5,34 23.5,34 24.6,34 31.5,34 33.85,36.35 C208.2@35.5,36.35
  Top Layer w1: J200.2@3,32 3,33.5 3.5,34 J203.2@3.5,35.5
  Bottom Layer w0.35: R304.1@19,30.3 R303.1@21.5,30.3 22.575,30.3 22.914,29.961 22.914,29.836 v1(23,29.75)